# EAGLE board SparkFun_MicroMod_ESP32-Panel (EAGLE 9.6.2), part 1 of 6
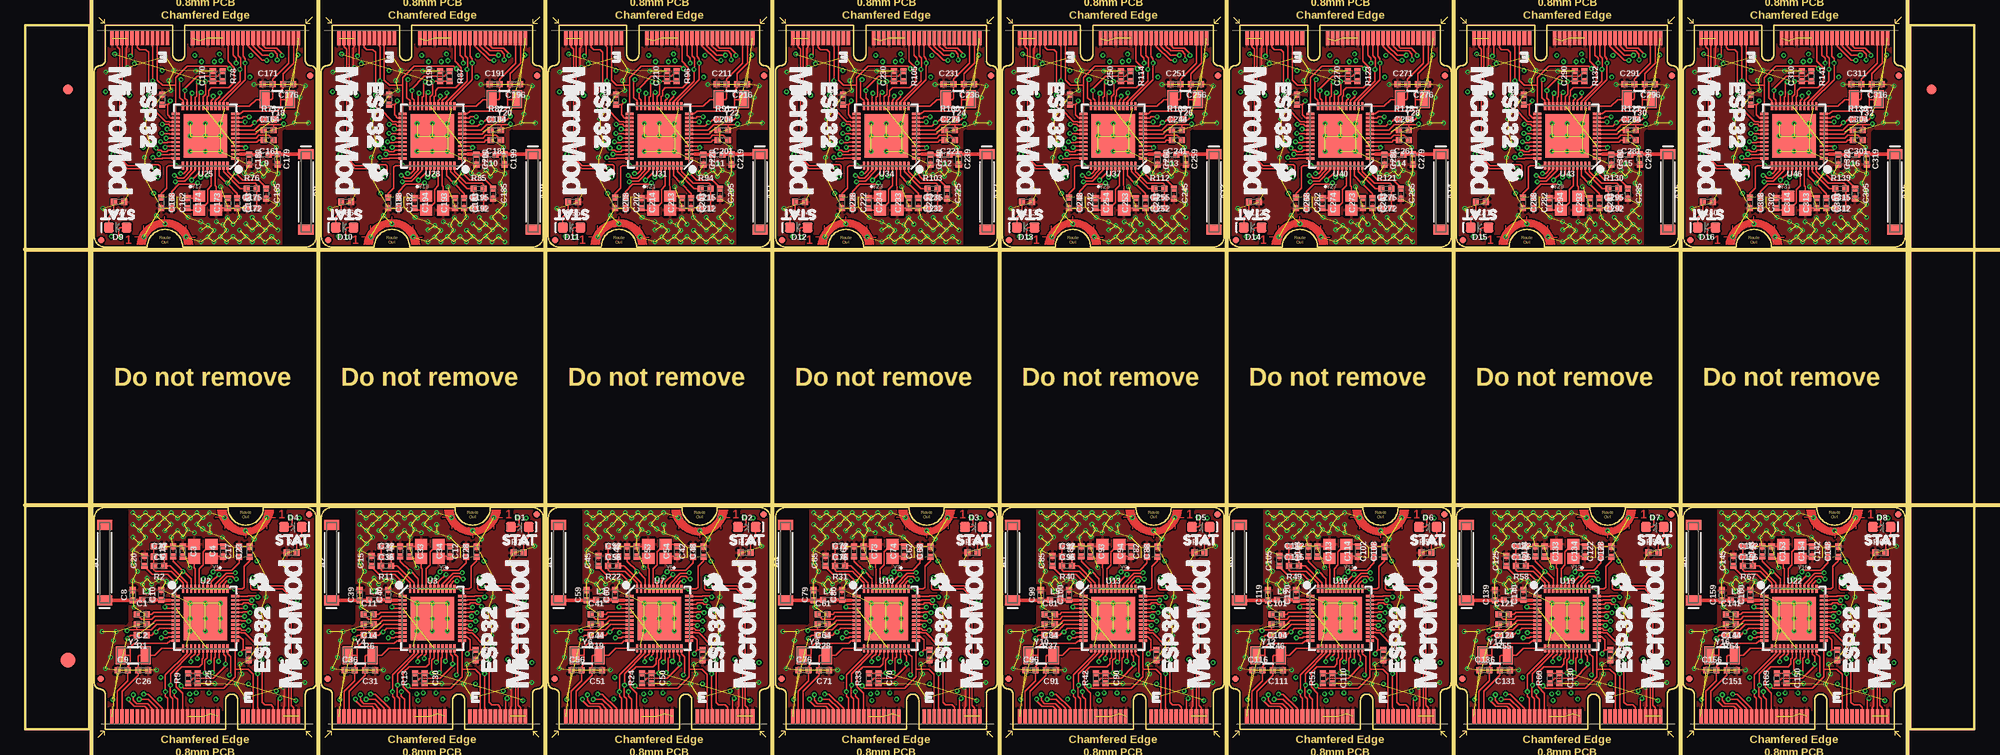
[diagram p0: board, top side]
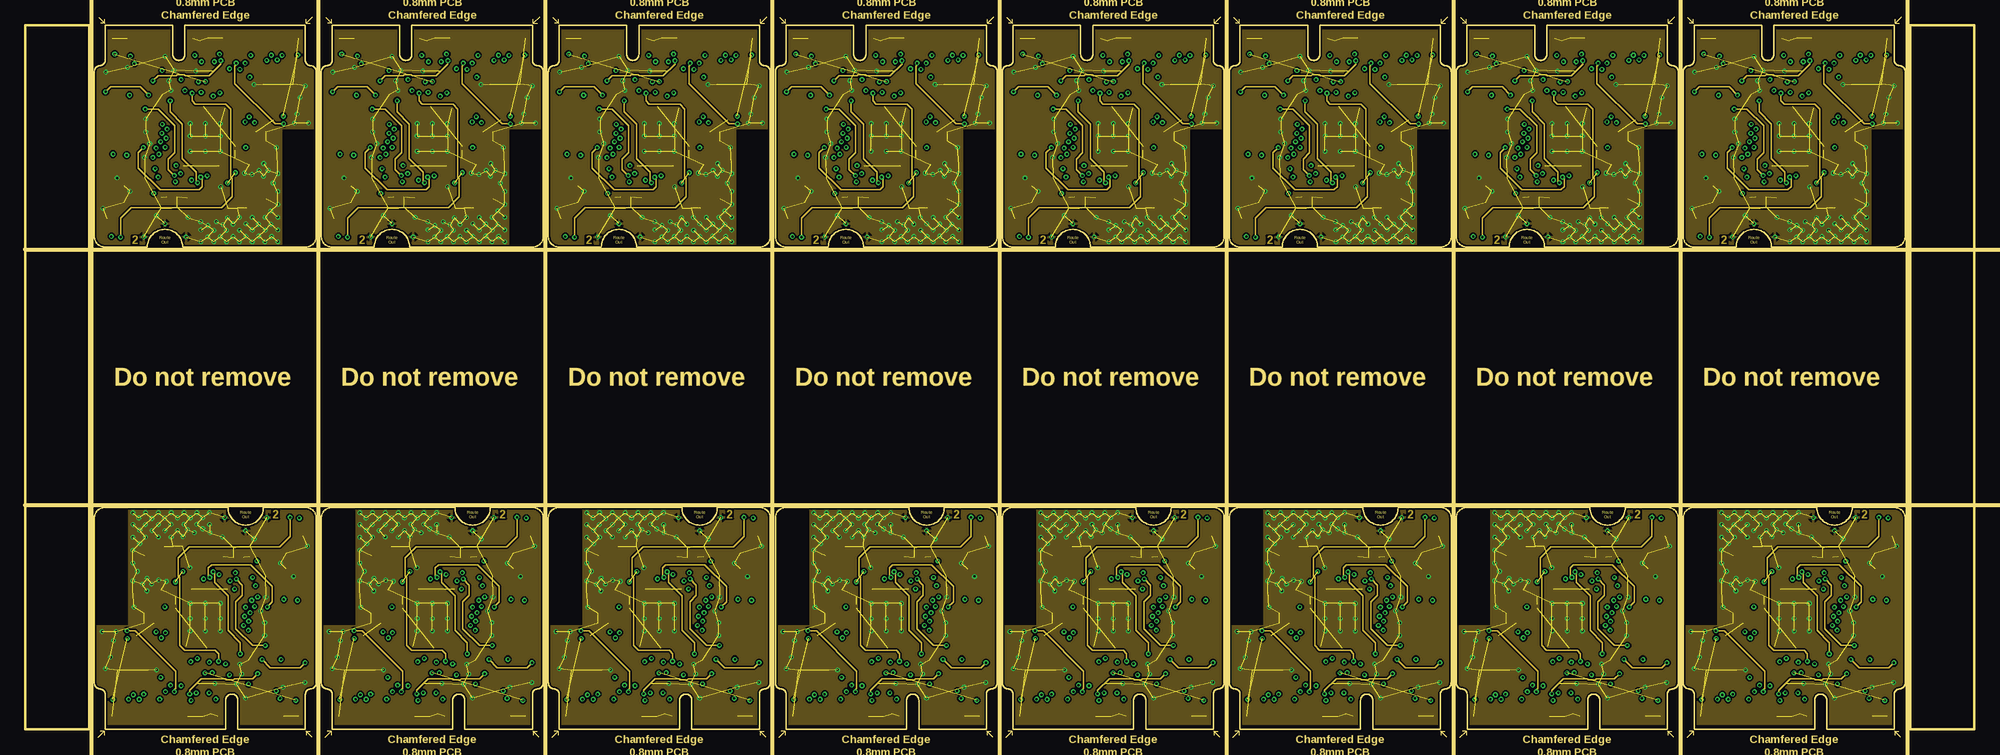
[diagram p1: board, inner layer Route2]
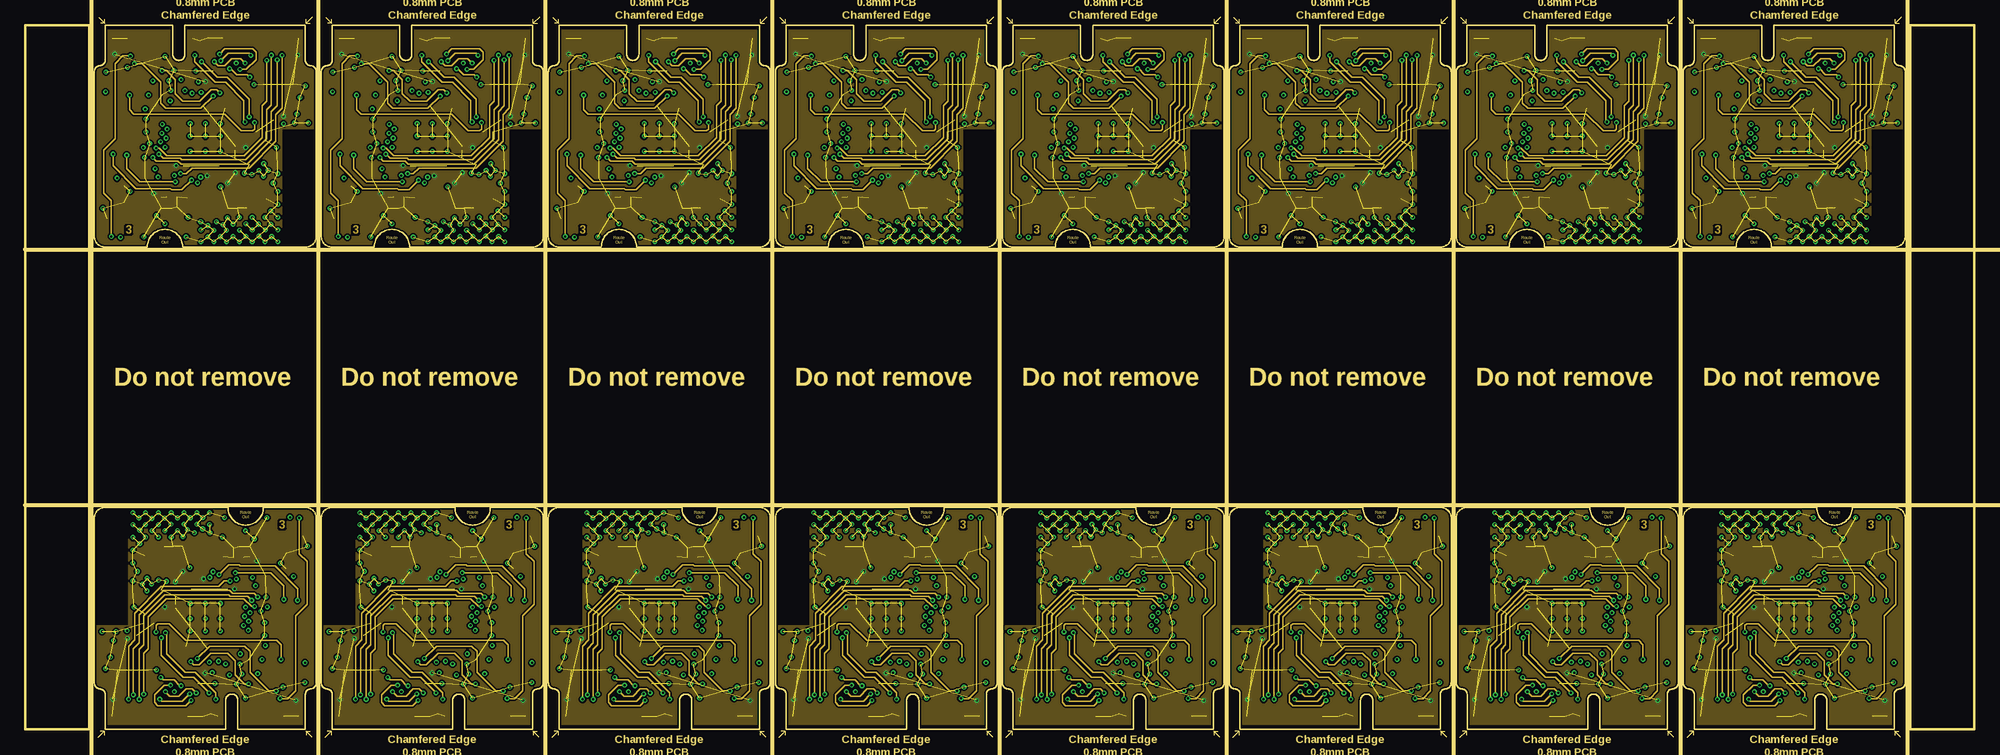
[diagram p2: board, inner layer Route15]
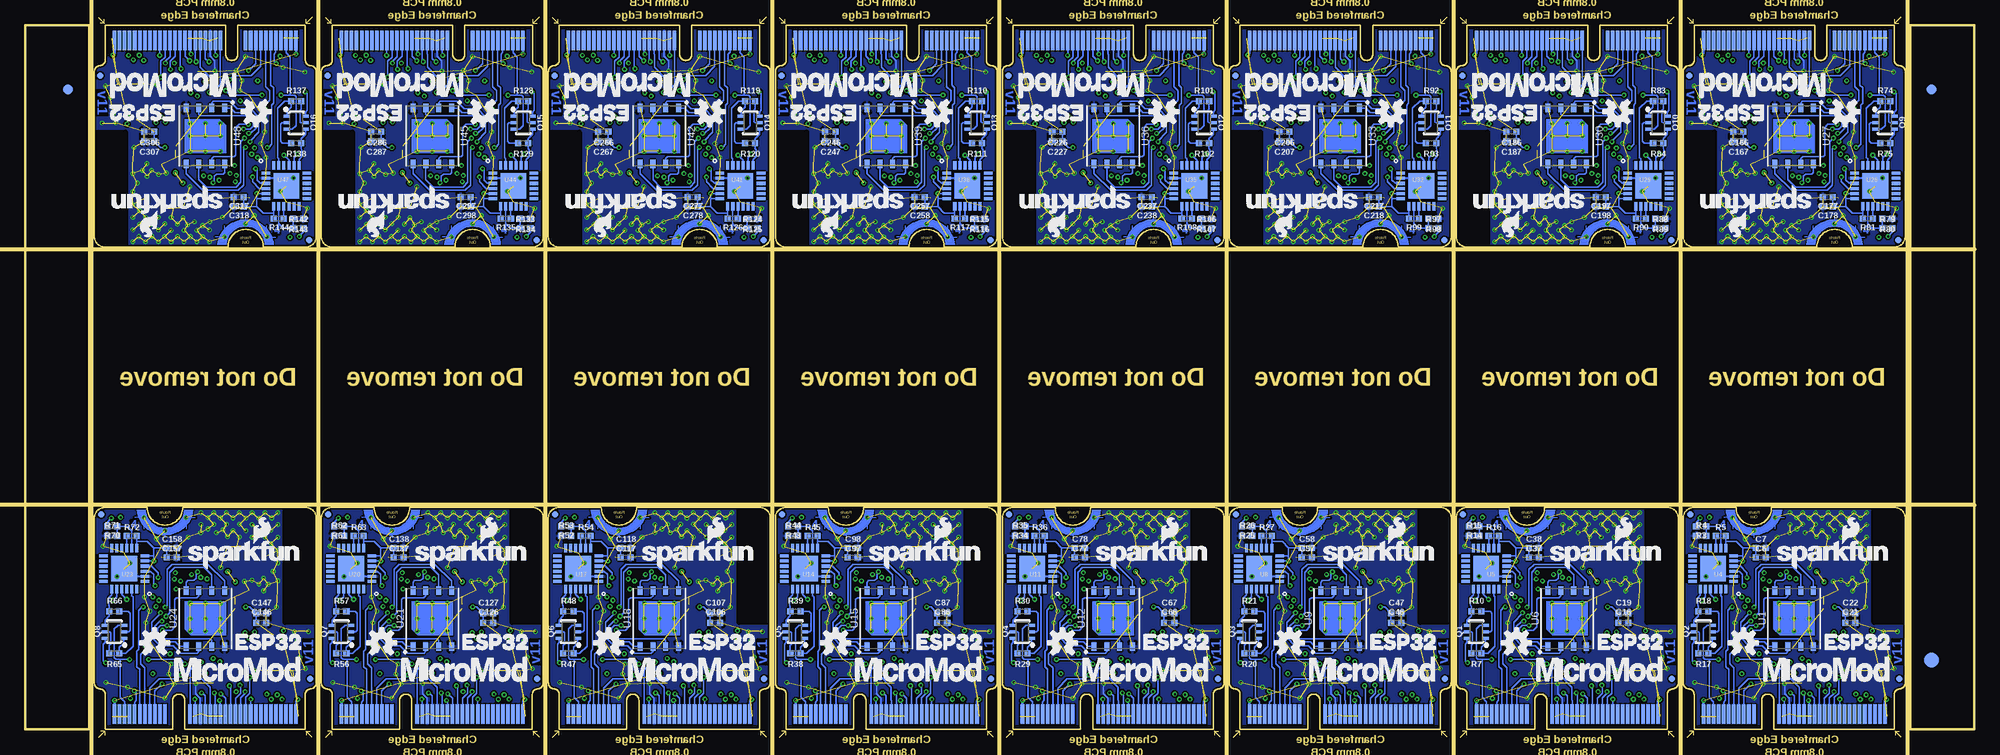
[diagram p3: board, bottom side, seen from below]

Size 193.27 x 69.85 mm. Coordinates in mm from the lower left corner, seen from the top.
Outline: 312 segments
Copper layers (1*2*15*16): Top 0.035559375mm / dielectric 0.47751875mm / Route2 0.035559375mm / dielectric 0.47751875mm / Route15 0.035559375mm / dielectric 0.47751875mm / Bottom 0.035559375mm
Design rules "SparkFun_MicroMod_ESP32": minimum track width 4mil, minimum drill 6mil, track to track 5mil, track to pad 5mil, pad to pad 5mil, via to via 5mil, smd to smd 5mil, copper to edge 4mil, drill to drill 4mil, minimum pad ring 5mil, minimum via ring 5mil, stop-mask expansion 4mil, vias tented up to drill 25mil, thermal gap 10mil
tRestrict: area 6.9,10.6 to 10,22; area 29.4,10.6 to 32.5,22; area 51.9,10.6 to 55,22; area 74.4,10.6 to 77.5,22; area 96.9,10.6 to 100,22; area 119.4,10.6 to 122.5,22; area 141.9,10.6 to 145,22; area 164.4,10.6 to 167.5,22; area 25.8,47.9 to 28.9,59.3; area 48.3,47.9 to 51.4,59.3; area 70.8,47.9 to 73.9,59.3; area 93.3,47.9 to 96.4,59.3; 4 more areas
bRestrict: area 6.9,10.6 to 10,22; area 29.4,10.6 to 32.5,22; area 51.9,10.6 to 55,22; area 74.4,10.6 to 77.5,22; area 96.9,10.6 to 100,22; area 119.4,10.6 to 122.5,22; area 141.9,10.6 to 145,22; area 164.4,10.6 to 167.5,22; area 25.8,47.9 to 28.9,59.3; area 48.3,47.9 to 51.4,59.3; area 70.8,47.9 to 73.9,59.3; area 93.3,47.9 to 96.4,59.3; 4 more areas; 64 lines
Milling: 11 lines

## Footprints (pad centres in the part's own frame; a part is rotated, then mirrored left to right if it is on the bottom)
ANT-2.4GHZ-8.0X1.0MM = smd 1 x 1.5: FEED -3.75,0; NC 3.75,0
0402-TIGHT = smd 0.6 x 0.6: 1 -0.5,0; 2 0.5,0
LED-0603 = smd 1 x 1: A -0.877,0; C 0.877,0
FIDUCIAL-1X2 = smd 1 x 1: 1 0,0
FIDUCIAL-1.5X3 = smd 1.5 x 1.5: 1 0,0
FIDUCIAL-MICRO = smd 0.635 x 0.635: 1 0,0
M.2-CARD-E-22 = smd 0.35 x 1.45: 1 9.25,1.275; 3 8.75,1.275; 5 8.25,1.275; 7 7.75,1.275; 9 7.25,1.275; 11 6.75,1.275; 13 6.25,1.275; 15 5.75,1.275; 17 5.25,1.275; 19 4.75,1.275; 21 4.25,1.275; 23 3.75,1.275; 33 1.25,1.275; 35 0.75,1.275; 37 0.25,1.275; 39 -0.25,1.275; 41 -0.75,1.275; 43 -1.25,1.275; 45 -1.75,1.275; 47 -2.25,1.275; 49 -2.75,1.275; 51 -3.25,1.275; 53 -3.75,1.275; 55 -4.25,1.275; 57 -4.75,1.275; 59 -5.25,1.275; 61 -5.75,1.275; 63 -6.25,1.275; 65 -6.75,1.275; 67 -7.25,1.275; 69 -7.75,1.275; 71 -8.25,1.275; 73 -8.75,1.275; 75 -9.25,1.275 | smd 0.35 x 1.95 bottom: 2 9,1.525; 4 8.5,1.525; 6 8,1.525; 8 7.5,1.525; 10 7,1.525; 12 6.5,1.525; 14 6,1.525; 16 5.5,1.525; 18 5,1.525; 20 4.5,1.525; 22 4,1.525; 32 1.5,1.525; 34 1,1.525; 36 0.5,1.525; 38 0,1.525; 40 -0.5,1.525; 42 -1,1.525; 44 -1.5,1.525; 46 -2,1.525; 48 -2.5,1.525; 50 -3,1.525; 52 -3.5,1.525; 54 -4,1.525; 56 -4.5,1.525; 58 -5,1.525; 60 -5.5,1.525; 62 -6,1.525; 64 -6.5,1.525; 66 -7,1.525; 68 -7.5,1.525; 70 -8,1.525; 72 -8.5,1.525; 74 -9,1.525 | drill 0.2: GND1 1.9,21; GND2 4,19.7; GND3 6.1,21
SC70-6 = smd 0.3 x 0.66: 1 -0.65,-0.92; 2 0,-0.92; 3 0.65,-0.92; 4 0.65,0.92; 5 0,0.92; 6 -0.65,0.92
WSON-8-6X5 = smd 0.85 x 0.5: 1 -2.775,1.905; 2 -2.775,0.635; 3 -2.775,-0.635; 4 -2.775,-1.905; 5 2.775,-1.905; 6 2.775,-0.635; 7 2.775,0.635; 8 2.775,1.905
QFN48-0.4MM = smd 0.8 x 0.23: 1 -2.95,2.2; 2 -2.95,1.8; 3 -2.95,1.4; 4 -2.95,1; 5 -2.95,0.6; 6 -2.95,0.2; 7 -2.95,-0.2; 8 -2.95,-0.6; 9 -2.95,-1; 10 -2.95,-1.4; 11 -2.95,-1.8; 12 -2.95,-2.2; 25 2.95,-2.2; 26 2.95,-1.8; 27 2.95,-1.4; 28 2.95,-1; 29 2.95,-0.6; 30 2.95,-0.2; 31 2.95,0.2; 32 2.95,0.6; 33 2.95,1; 34 2.95,1.4; 35 2.95,1.8; 36 2.95,2.2 | smd 0.23 x 0.8: 13 -2.2,-2.95; 14 -1.8,-2.95; 15 -1.4,-2.95; 16 -1,-2.95; 17 -0.6,-2.95; 18 -0.2,-2.95; 19 0.2,-2.95; 20 0.6,-2.95; 21 1,-2.95; 22 1.4,-2.95; 23 1.8,-2.95; 24 2.2,-2.95; 37 2.2,2.95; 38 1.8,2.95; 39 1.4,2.95; 40 1,2.95; 41 0.6,2.95; 42 0.2,2.95; 43 -0.2,2.95; 44 -0.6,2.95; 45 -1,2.95; 46 -1.4,2.95; 47 -1.8,2.95; 48 -2.2,2.95 | smd 4.3 x 4.3: EP 0,0
QFN24 = smd 0.85 x 0.3: 1 -2.05,1.25; 2 -2.05,0.75; 3 -2.05,0.25; 4 -2.05,-0.25; 5 -2.05,-0.75; 6 -2.05,-1.25; 13 2.05,-1.25; 14 2.05,-0.75; 15 2.05,-0.25; 16 2.05,0.25; 17 2.05,0.75; 18 2.05,1.25 | smd 0.3 x 0.85: 7 -1.25,-2.05; 8 -0.75,-2.05; 9 -0.25,-2.05; 10 0.25,-2.05; 11 0.75,-2.05; 12 1.25,-2.05; 19 1.25,2.05; 20 0.75,2.05; 21 0.25,2.05; 22 -0.25,2.05; 23 -0.75,2.05; 24 -1.25,2.05 | smd 2.55 x 2.55: PAD 0,0
CRYSTAL-SMD-2X2.5MM = smd 1.2 x 1.1: P1 0.846,0.69; P2 -0.854,0.69; P3 -0.854,-0.71; P4 0.846,-0.71
CRYSTAL-SMD-3.2X1.5MM = smd 1 x 1.8: P$1 -1.25,0; P$2 1.25,0

## Placement (x,y rotation side)
A1  [ANT-2.4GHZ-8.0X1.0MM]  7.87,16.54 90 top
A2  [ANT-2.4GHZ-8.0X1.0MM]  30.38,16.54 90 top
A3  [ANT-2.4GHZ-8.0X1.0MM]  52.89,16.54 90 top
A4  [ANT-2.4GHZ-8.0X1.0MM]  75.4,16.54 90 top
A5  [ANT-2.4GHZ-8.0X1.0MM]  97.91,16.54 90 top
A6  [ANT-2.4GHZ-8.0X1.0MM]  120.41,16.54 90 top
A7  [ANT-2.4GHZ-8.0X1.0MM]  142.92,16.54 90 top
A8  [ANT-2.4GHZ-8.0X1.0MM]  165.43,16.54 90 top
A9  [ANT-2.4GHZ-8.0X1.0MM]  27.84,53.31 270 top
A10  [ANT-2.4GHZ-8.0X1.0MM]  50.35,53.31 270 top
A11  [ANT-2.4GHZ-8.0X1.0MM]  72.86,53.31 270 top
A12  [ANT-2.4GHZ-8.0X1.0MM]  95.37,53.31 270 top
A13  [ANT-2.4GHZ-8.0X1.0MM]  117.87,53.31 270 top
A14  [ANT-2.4GHZ-8.0X1.0MM]  140.38,53.31 270 top
A15  [ANT-2.4GHZ-8.0X1.0MM]  162.89,53.31 270 top
A16  [ANT-2.4GHZ-8.0X1.0MM]  185.4,53.31 270 top
C1  270pF  [0402-TIGHT]  11.56,11.42 0 top
C2  270pF  [0402-TIGHT]  11.56,10.4 180 top
C3  12pF  [0402-TIGHT]  15.61,17.63 270 top
C4  12pF  [0402-TIGHT]  19.63,17.63 90 top
C5  10nF  [0402-TIGHT]  13.27,18.14 180 top
C6  0.1uF  [0402-TIGHT]  21.18,17.06 0 bottom
C7  4.7uF  [0402-TIGHT]  21.18,18.01 0 bottom
C8  DNP  [0402-TIGHT]  10.67,13.31 90 top
C9  15pF  [0402-TIGHT]  9.65,5.84 0 top
C10  DNP  [0402-TIGHT]  13.49,13.34 90 top
C11  270pF  [0402-TIGHT]  34.06,11.42 0 top
C12  0.1uF  [0402-TIGHT]  43.71,17.62 90 top
C13  100pF  [0402-TIGHT]  37.19,17.64 90 top
C14  270pF  [0402-TIGHT]  34.06,10.4 180 top
C15  0.1uF  [0402-TIGHT]  34.33,16.7 90 top
C16  0.1uF  [0402-TIGHT]  34.81,10.58 0 bottom
C17  0.1uF  [0402-TIGHT]  21.2,17.62 90 top
C18  100pF  [0402-TIGHT]  14.68,17.64 90 top
C19  10uF  [0402-TIGHT]  34.81,11.5 0 bottom
C20  0.1uF  [0402-TIGHT]  11.83,16.7 90 top
C21  0.1uF  [0402-TIGHT]  12.31,10.58 0 bottom
C22  10uF  [0402-TIGHT]  12.31,11.5 0 bottom
C23  0.1uF  [0402-TIGHT]  22.25,17.62 90 top
C24  1.0uF  [0402-TIGHT]  22.14,7.37 270 top
C25  0.1uF  [0402-TIGHT]  17.1,5.06 270 top
C26  15pF  [0402-TIGHT]  11.68,5.84 180 top
C27  3.0nF  [0402-TIGHT]  13.27,17.13 0 top
C28  0.1uF  [0402-TIGHT]  44.76,17.62 90 top
C29  1.0uF  [0402-TIGHT]  44.65,7.37 270 top
C30  0.1uF  [0402-TIGHT]  39.6,5.06 270 top
C31  15pF  [0402-TIGHT]  34.19,5.84 180 top
C32  3.0nF  [0402-TIGHT]  35.77,17.13 0 top
C33  12pF  [0402-TIGHT]  38.12,17.63 270 top
C34  12pF  [0402-TIGHT]  42.14,17.63 90 top
C35  10nF  [0402-TIGHT]  35.77,18.14 180 top
C36  15pF  [0402-TIGHT]  32.16,5.84 0 top
C37  0.1uF  [0402-TIGHT]  43.69,17.06 0 bottom
C38  4.7uF  [0402-TIGHT]  43.69,18.01 0 bottom
C39  DNP  [0402-TIGHT]  33.17,13.31 90 top
C40  DNP  [0402-TIGHT]  35.99,13.34 90 top
C41  270pF  [0402-TIGHT]  56.57,11.42 0 top
C42  0.1uF  [0402-TIGHT]  66.22,17.62 90 top
C43  100pF  [0402-TIGHT]  59.7,17.64 90 top
C44  270pF  [0402-TIGHT]  56.57,10.4 180 top
C45  0.1uF  [0402-TIGHT]  56.84,16.7 90 top
C46  0.1uF  [0402-TIGHT]  57.32,10.58 0 bottom
C47  10uF  [0402-TIGHT]  57.32,11.5 0 bottom
C48  0.1uF  [0402-TIGHT]  67.27,17.62 90 top
C49  1.0uF  [0402-TIGHT]  67.16,7.37 270 top
C50  0.1uF  [0402-TIGHT]  62.11,5.06 270 top
C51  15pF  [0402-TIGHT]  56.7,5.84 180 top
C52  3.0nF  [0402-TIGHT]  58.28,17.13 0 top
C53  12pF  [0402-TIGHT]  60.63,17.63 270 top
C54  12pF  [0402-TIGHT]  64.65,17.63 90 top
C55  10nF  [0402-TIGHT]  58.28,18.14 180 top
C56  15pF  [0402-TIGHT]  54.67,5.84 0 top
C57  0.1uF  [0402-TIGHT]  66.2,17.06 0 bottom
C58  4.7uF  [0402-TIGHT]  66.2,18.01 0 bottom
C59  DNP  [0402-TIGHT]  55.68,13.31 90 top
C60  DNP  [0402-TIGHT]  58.5,13.34 90 top
C61  270pF  [0402-TIGHT]  79.08,11.42 0 top
C62  0.1uF  [0402-TIGHT]  88.73,17.62 90 top
C63  100pF  [0402-TIGHT]  82.21,17.64 90 top
C64  270pF  [0402-TIGHT]  79.08,10.4 180 top
C65  0.1uF  [0402-TIGHT]  79.35,16.7 90 top
C66  0.1uF  [0402-TIGHT]  79.83,10.58 0 bottom
C67  10uF  [0402-TIGHT]  79.83,11.5 0 bottom
C68  0.1uF  [0402-TIGHT]  89.77,17.62 90 top
C69  1.0uF  [0402-TIGHT]  89.66,7.37 270 top
C70  0.1uF  [0402-TIGHT]  84.62,5.06 270 top
C71  15pF  [0402-TIGHT]  79.21,5.84 180 top
C72  3.0nF  [0402-TIGHT]  80.79,17.13 0 top
C73  12pF  [0402-TIGHT]  83.14,17.63 270 top
C74  12pF  [0402-TIGHT]  87.15,17.63 90 top
C75  10nF  [0402-TIGHT]  80.79,18.14 180 top
C76  15pF  [0402-TIGHT]  77.18,5.84 0 top
C77  0.1uF  [0402-TIGHT]  88.7,17.06 0 bottom
C78  4.7uF  [0402-TIGHT]  88.7,18.01 0 bottom
C79  DNP  [0402-TIGHT]  78.19,13.31 90 top
C80  DNP  [0402-TIGHT]  81.01,13.34 90 top
C81  270pF  [0402-TIGHT]  101.59,11.42 0 top
C82  0.1uF  [0402-TIGHT]  111.24,17.62 90 top
C83  100pF  [0402-TIGHT]  104.72,17.64 90 top
C84  270pF  [0402-TIGHT]  101.59,10.4 180 top
C85  0.1uF  [0402-TIGHT]  101.86,16.7 90 top
C86  0.1uF  [0402-TIGHT]  102.34,10.58 0 bottom
C87  10uF  [0402-TIGHT]  102.34,11.5 0 bottom
C88  0.1uF  [0402-TIGHT]  112.28,17.62 90 top
C89  1.0uF  [0402-TIGHT]  112.17,7.37 270 top
C90  0.1uF  [0402-TIGHT]  107.13,5.06 270 top
C91  15pF  [0402-TIGHT]  101.72,5.84 180 top
C92  3.0nF  [0402-TIGHT]  103.3,17.13 0 top
C93  12pF  [0402-TIGHT]  105.65,17.63 270 top
C94  12pF  [0402-TIGHT]  109.66,17.63 90 top
C95  10nF  [0402-TIGHT]  103.3,18.14 180 top
C96  15pF  [0402-TIGHT]  99.68,5.84 0 top
C97  0.1uF  [0402-TIGHT]  111.21,17.06 0 bottom
C98  4.7uF  [0402-TIGHT]  111.21,18.01 0 bottom
C99  DNP  [0402-TIGHT]  100.7,13.31 90 top
C100  DNP  [0402-TIGHT]  103.52,13.34 90 top
C101  270pF  [0402-TIGHT]  124.1,11.42 0 top
C102  0.1uF  [0402-TIGHT]  133.74,17.62 90 top
C103  100pF  [0402-TIGHT]  127.22,17.64 90 top
C104  270pF  [0402-TIGHT]  124.1,10.4 180 top
C105  0.1uF  [0402-TIGHT]  124.37,16.7 90 top
C106  0.1uF  [0402-TIGHT]  124.85,10.58 0 bottom
C107  10uF  [0402-TIGHT]  124.85,11.5 0 bottom
C108  0.1uF  [0402-TIGHT]  134.79,17.62 90 top
C109  1.0uF  [0402-TIGHT]  134.68,7.37 270 top
C110  0.1uF  [0402-TIGHT]  129.64,5.06 270 top
C111  15pF  [0402-TIGHT]  124.22,5.84 180 top
C112  3.0nF  [0402-TIGHT]  125.8,17.13 0 top
C113  12pF  [0402-TIGHT]  128.15,17.63 270 top
C114  12pF  [0402-TIGHT]  132.17,17.63 90 top
C115  10nF  [0402-TIGHT]  125.8,18.14 180 top
C116  15pF  [0402-TIGHT]  122.19,5.84 0 top
C117  0.1uF  [0402-TIGHT]  133.72,17.06 0 bottom
C118  4.7uF  [0402-TIGHT]  133.72,18.01 0 bottom
C119  DNP  [0402-TIGHT]  123.21,13.31 90 top
C120  DNP  [0402-TIGHT]  126.03,13.34 90 top
C121  270pF  [0402-TIGHT]  146.61,11.42 0 top
C122  0.1uF  [0402-TIGHT]  156.25,17.62 90 top
C123  100pF  [0402-TIGHT]  149.73,17.64 90 top
C124  270pF  [0402-TIGHT]  146.61,10.4 180 top
C125  0.1uF  [0402-TIGHT]  146.88,16.7 90 top
C126  0.1uF  [0402-TIGHT]  147.36,10.58 0 bottom
C127  10uF  [0402-TIGHT]  147.36,11.5 0 bottom
C128  0.1uF  [0402-TIGHT]  157.3,17.62 90 top
C129  1.0uF  [0402-TIGHT]  157.19,7.37 270 top
C130  0.1uF  [0402-TIGHT]  152.15,5.06 270 top
C131  15pF  [0402-TIGHT]  146.73,5.84 180 top
C132  3.0nF  [0402-TIGHT]  148.31,17.13 0 top
C133  12pF  [0402-TIGHT]  150.66,17.63 270 top
C134  12pF  [0402-TIGHT]  154.68,17.63 90 top
C135  10nF  [0402-TIGHT]  148.31,18.14 180 top
C136  15pF  [0402-TIGHT]  144.7,5.84 0 top
C137  0.1uF  [0402-TIGHT]  156.23,17.06 0 bottom
C138  4.7uF  [0402-TIGHT]  156.23,18.01 0 bottom
C139  DNP  [0402-TIGHT]  145.72,13.31 90 top
C140  DNP  [0402-TIGHT]  148.54,13.34 90 top
C141  270pF  [0402-TIGHT]  169.11,11.42 0 top
C142  0.1uF  [0402-TIGHT]  178.76,17.62 90 top
C143  100pF  [0402-TIGHT]  172.24,17.64 90 top
C144  270pF  [0402-TIGHT]  169.11,10.4 180 top
C145  0.1uF  [0402-TIGHT]  169.38,16.7 90 top
C146  0.1uF  [0402-TIGHT]  169.86,10.58 0 bottom
C147  10uF  [0402-TIGHT]  169.86,11.5 0 bottom
C148  0.1uF  [0402-TIGHT]  179.81,17.62 90 top
C149  1.0uF  [0402-TIGHT]  179.7,7.37 270 top
C150  0.1uF  [0402-TIGHT]  174.65,5.06 270 top
C151  15pF  [0402-TIGHT]  169.24,5.84 180 top
C152  3.0nF  [0402-TIGHT]  170.82,17.13 0 top
C153  12pF  [0402-TIGHT]  173.17,17.63 270 top
C154  12pF  [0402-TIGHT]  177.19,17.63 90 top
C155  10nF  [0402-TIGHT]  170.82,18.14 180 top
C156  15pF  [0402-TIGHT]  167.21,5.84 0 top
C157  0.1uF  [0402-TIGHT]  178.74,17.06 0 bottom
C158  4.7uF  [0402-TIGHT]  178.74,18.01 0 bottom
C159  DNP  [0402-TIGHT]  168.22,13.31 90 top
C160  DNP  [0402-TIGHT]  171.04,13.34 90 top
C161  270pF  [0402-TIGHT]  24.16,58.43 180 top
C162  0.1uF  [0402-TIGHT]  14.51,52.23 270 top
C163  100pF  [0402-TIGHT]  21.03,52.22 270 top
C164  270pF  [0402-TIGHT]  24.16,59.45 0 top
C165  0.1uF  [0402-TIGHT]  23.89,53.15 270 top
C166  0.1uF  [0402-TIGHT]  23.41,59.27 180 bottom
C167  10uF  [0402-TIGHT]  23.41,58.35 180 bottom
C168  0.1uF  [0402-TIGHT]  13.46,52.23 270 top
C169  1.0uF  [0402-TIGHT]  13.58,62.48 90 top
C170  0.1uF  [0402-TIGHT]  18.62,64.79 90 top
C171  15pF  [0402-TIGHT]  24.03,64.01 0 top
C172  3.0nF  [0402-TIGHT]  22.45,52.72 180 top
C173  12pF  [0402-TIGHT]  20.1,52.22 90 top
C174  12pF  [0402-TIGHT]  16.09,52.22 270 top
C175  10nF  [0402-TIGHT]  22.45,51.71 0 top
C176  15pF  [0402-TIGHT]  26.06,64.01 180 top
C177  0.1uF  [0402-TIGHT]  14.54,52.79 180 bottom
C178  4.7uF  [0402-TIGHT]  14.54,51.84 180 bottom
C179  DNP  [0402-TIGHT]  25.05,56.54 270 top
C180  DNP  [0402-TIGHT]  22.23,56.52 270 top
C181  270pF  [0402-TIGHT]  46.67,58.43 180 top
C182  0.1uF  [0402-TIGHT]  37.02,52.23 270 top
C183  100pF  [0402-TIGHT]  43.54,52.22 270 top
C184  270pF  [0402-TIGHT]  46.67,59.45 0 top
C185  0.1uF  [0402-TIGHT]  46.4,53.15 270 top
C186  0.1uF  [0402-TIGHT]  45.92,59.27 180 bottom
C187  10uF  [0402-TIGHT]  45.92,58.35 180 bottom
C188  0.1uF  [0402-TIGHT]  35.97,52.23 270 top
C189  1.0uF  [0402-TIGHT]  36.09,62.48 90 top
C190  0.1uF  [0402-TIGHT]  41.13,64.79 90 top
C191  15pF  [0402-TIGHT]  46.54,64.01 0 top
C192  3.0nF  [0402-TIGHT]  44.96,52.72 180 top
C193  12pF  [0402-TIGHT]  42.61,52.22 90 top
C194  12pF  [0402-TIGHT]  38.6,52.22 270 top
C195  10nF  [0402-TIGHT]  44.96,51.71 0 top
C196  15pF  [0402-TIGHT]  48.57,64.01 180 top
C197  0.1uF  [0402-TIGHT]  37.04,52.79 180 bottom
C198  4.7uF  [0402-TIGHT]  37.04,51.84 180 bottom
C199  DNP  [0402-TIGHT]  47.56,56.54 270 top
C200  DNP  [0402-TIGHT]  44.74,56.52 270 top
C201  270pF  [0402-TIGHT]  69.17,58.43 180 top
C202  0.1uF  [0402-TIGHT]  59.53,52.23 270 top
C203  100pF  [0402-TIGHT]  66.05,52.22 270 top
C204  270pF  [0402-TIGHT]  69.17,59.45 0 top
C205  0.1uF  [0402-TIGHT]  68.91,53.15 270 top
C206  0.1uF  [0402-TIGHT]  68.42,59.27 180 bottom
C207  10uF  [0402-TIGHT]  68.42,58.35 180 bottom
C208  0.1uF  [0402-TIGHT]  58.48,52.23 270 top
C209  1.0uF  [0402-TIGHT]  58.59,62.48 90 top
C210  0.1uF  [0402-TIGHT]  63.63,64.79 90 top
C211  15pF  [0402-TIGHT]  69.05,64.01 0 top
C212  3.0nF  [0402-TIGHT]  67.47,52.72 180 top
C213  12pF  [0402-TIGHT]  65.12,52.22 90 top
C214  12pF  [0402-TIGHT]  61.1,52.22 270 top
C215  10nF  [0402-TIGHT]  67.47,51.71 0 top
C216  15pF  [0402-TIGHT]  71.08,64.01 180 top
C217  0.1uF  [0402-TIGHT]  59.55,52.79 180 bottom
C218  4.7uF  [0402-TIGHT]  59.55,51.84 180 bottom
C219  DNP  [0402-TIGHT]  70.06,56.54 270 top
C220  DNP  [0402-TIGHT]  67.24,56.52 270 top
C221  270pF  [0402-TIGHT]  91.68,58.43 180 top
C222  0.1uF  [0402-TIGHT]  82.04,52.23 270 top
C223  100pF  [0402-TIGHT]  88.56,52.22 270 top
C224  270pF  [0402-TIGHT]  91.68,59.45 0 top
C225  0.1uF  [0402-TIGHT]  91.41,53.15 270 top
C226  0.1uF  [0402-TIGHT]  90.93,59.27 180 bottom
C227  10uF  [0402-TIGHT]  90.93,58.35 180 bottom
C228  0.1uF  [0402-TIGHT]  80.99,52.23 270 top
C229  1.0uF  [0402-TIGHT]  81.1,62.48 90 top
C230  0.1uF  [0402-TIGHT]  86.14,64.79 90 top
C231  15pF  [0402-TIGHT]  91.56,64.01 0 top
C232  3.0nF  [0402-TIGHT]  89.98,52.72 180 top
C233  12pF  [0402-TIGHT]  87.63,52.22 90 top
C234  12pF  [0402-TIGHT]  83.61,52.22 270 top
C235  10nF  [0402-TIGHT]  89.98,51.71 0 top
C236  15pF  [0402-TIGHT]  93.59,64.01 180 top
C237  0.1uF  [0402-TIGHT]  82.06,52.79 180 bottom
C238  4.7uF  [0402-TIGHT]  82.06,51.84 180 bottom
C239  DNP  [0402-TIGHT]  92.57,56.54 270 top
C240  DNP  [0402-TIGHT]  89.75,56.52 270 top
C241  270pF  [0402-TIGHT]  114.19,58.43 180 top
C242  0.1uF  [0402-TIGHT]  104.54,52.23 270 top
C243  100pF  [0402-TIGHT]  111.06,52.22 270 top
C244  270pF  [0402-TIGHT]  114.19,59.45 0 top
C245  0.1uF  [0402-TIGHT]  113.92,53.15 270 top
C246  0.1uF  [0402-TIGHT]  113.44,59.27 180 bottom
C247  10uF  [0402-TIGHT]  113.44,58.35 180 bottom
C248  0.1uF  [0402-TIGHT]  103.5,52.23 270 top
C249  1.0uF  [0402-TIGHT]  103.61,62.48 90 top
C250  0.1uF  [0402-TIGHT]  108.65,64.79 90 top
C251  15pF  [0402-TIGHT]  114.06,64.01 0 top
C252  3.0nF  [0402-TIGHT]  112.48,52.72 180 top
C253  12pF  [0402-TIGHT]  110.13,52.22 90 top
C254  12pF  [0402-TIGHT]  106.12,52.22 270 top
C255  10nF  [0402-TIGHT]  112.48,51.71 0 top
C256  15pF  [0402-TIGHT]  116.1,64.01 180 top
C257  0.1uF  [0402-TIGHT]  104.57,52.79 180 bottom
C258  4.7uF  [0402-TIGHT]  104.57,51.84 180 bottom
C259  DNP  [0402-TIGHT]  115.08,56.54 270 top
C260  DNP  [0402-TIGHT]  112.26,56.52 270 top
C261  270pF  [0402-TIGHT]  136.7,58.43 180 top
C262  0.1uF  [0402-TIGHT]  127.05,52.23 270 top
C263  100pF  [0402-TIGHT]  133.57,52.22 270 top
C264  270pF  [0402-TIGHT]  136.7,59.45 0 top
C265  0.1uF  [0402-TIGHT]  136.43,53.15 270 top
C266  0.1uF  [0402-TIGHT]  135.95,59.27 180 bottom
C267  10uF  [0402-TIGHT]  135.95,58.35 180 bottom
C268  0.1uF  [0402-TIGHT]  126.01,52.23 270 top
C269  1.0uF  [0402-TIGHT]  126.12,62.48 90 top
C270  0.1uF  [0402-TIGHT]  131.16,64.79 90 top
C271  15pF  [0402-TIGHT]  136.57,64.01 0 top
C272  3.0nF  [0402-TIGHT]  134.99,52.72 180 top
C273  12pF  [0402-TIGHT]  132.64,52.22 90 top
C274  12pF  [0402-TIGHT]  128.63,52.22 270 top
C275  10nF  [0402-TIGHT]  134.99,51.71 0 top
C276  15pF  [0402-TIGHT]  138.61,64.01 180 top
C277  0.1uF  [0402-TIGHT]  127.08,52.79 180 bottom
C278  4.7uF  [0402-TIGHT]  127.08,51.84 180 bottom
C279  DNP  [0402-TIGHT]  137.59,56.54 270 top
C280  DNP  [0402-TIGHT]  134.77,56.52 270 top
C281  270pF  [0402-TIGHT]  159.21,58.43 180 top
C282  0.1uF  [0402-TIGHT]  149.56,52.23 270 top
C283  100pF  [0402-TIGHT]  156.08,52.22 270 top
C284  270pF  [0402-TIGHT]  159.21,59.45 0 top
C285  0.1uF  [0402-TIGHT]  158.94,53.15 270 top
C286  0.1uF  [0402-TIGHT]  158.46,59.27 180 bottom
C287  10uF  [0402-TIGHT]  158.46,58.35 180 bottom
C288  0.1uF  [0402-TIGHT]  148.51,52.23 270 top
C289  1.0uF  [0402-TIGHT]  148.63,62.48 90 top
C290  0.1uF  [0402-TIGHT]  153.67,64.79 90 top
C291  15pF  [0402-TIGHT]  159.08,64.01 0 top
C292  3.0nF  [0402-TIGHT]  157.5,52.72 180 top
C293  12pF  [0402-TIGHT]  155.15,52.22 90 top
C294  12pF  [0402-TIGHT]  151.14,52.22 270 top
C295  10nF  [0402-TIGHT]  157.5,51.71 0 top
C296  15pF  [0402-TIGHT]  161.11,64.01 180 top
C297  0.1uF  [0402-TIGHT]  149.58,52.79 180 bottom
C298  4.7uF  [0402-TIGHT]  149.58,51.84 180 bottom
C299  DNP  [0402-TIGHT]  160.1,56.54 270 top
C300  DNP  [0402-TIGHT]  157.28,56.52 270 top
C301  270pF  [0402-TIGHT]  181.71,58.43 180 top
C302  0.1uF  [0402-TIGHT]  172.07,52.23 270 top
C303  100pF  [0402-TIGHT]  178.59,52.22 270 top
C304  270pF  [0402-TIGHT]  181.71,59.45 0 top
C305  0.1uF  [0402-TIGHT]  181.45,53.15 270 top
C306  0.1uF  [0402-TIGHT]  180.96,59.27 180 bottom
C307  10uF  [0402-TIGHT]  180.96,58.35 180 bottom
C308  0.1uF  [0402-TIGHT]  171.02,52.23 270 top
C309  1.0uF  [0402-TIGHT]  171.13,62.48 90 top
C310  0.1uF  [0402-TIGHT]  176.17,64.79 90 top
C311  15pF  [0402-TIGHT]  181.59,64.01 0 top
C312  3.0nF  [0402-TIGHT]  180.01,52.72 180 top
C313  12pF  [0402-TIGHT]  177.66,52.22 90 top
C314  12pF  [0402-TIGHT]  173.64,52.22 270 top
C315  10nF  [0402-TIGHT]  180.01,51.71 0 top
C316  15pF  [0402-TIGHT]  183.62,64.01 180 top
C317  0.1uF  [0402-TIGHT]  172.09,52.79 180 bottom
C318  4.7uF  [0402-TIGHT]  172.09,51.84 180 bottom
C319  DNP  [0402-TIGHT]  182.6,56.54 270 top
C320  DNP  [0402-TIGHT]  179.78,56.52 270 top
D1  BLUE  [LED-0603]  49.05,20.07 0 top
D2  BLUE  [LED-0603]  71.56,20.07 0 top
D3  BLUE  [LED-0603]  94.07,20.07 0 top
D4  BLUE  [LED-0603]  26.54,20.07 0 top
D5  BLUE  [LED-0603]  116.58,20.07 0 top
D6  BLUE  [LED-0603]  139.08,20.07 0 top
D7  BLUE  [LED-0603]  161.59,20.07 0 top
D8  BLUE  [LED-0603]  184.1,20.07 0 top
D9  BLUE  [LED-0603]  9.17,49.78 180 top
D10  BLUE  [LED-0603]  31.68,49.78 180 top
D11  BLUE  [LED-0603]  54.19,49.78 180 top
D12  BLUE  [LED-0603]  76.7,49.78 180 top
D13  BLUE  [LED-0603]  99.2,49.78 180 top
D14  BLUE  [LED-0603]  121.71,49.78 180 top
D15  BLUE  [LED-0603]  144.22,49.78 180 top
D16  BLUE  [LED-0603]  166.73,49.78 180 top
E$1  [FIDUCIAL-1X2]  4.23,63.5 0 top
E$2  [FIDUCIAL-1X2]  4.23,63.5 0 bottom
E$3  [FIDUCIAL-1X2]  189.04,63.5 0 top
E$4  [FIDUCIAL-1X2]  189.04,63.5 0 bottom
E$5  [FIDUCIAL-1.5X3]  4.23,6.86 0 top
E$6  [FIDUCIAL-1.5X3]  4.23,6.86 0 bottom
FD1  FIDUCIALUFIDUCIAL  [FIDUCIAL-MICRO]  7.47,5 0 top
FD2  FIDUCIALUFIDUCIAL  [FIDUCIAL-MICRO]  7.46,5 0 bottom
FD3  FIDUCIALUFIDUCIAL  [FIDUCIAL-MICRO]  28.18,21.3 0 bottom
FD4  FIDUCIALUFIDUCIAL  [FIDUCIAL-MICRO]  28.18,21.3 0 top
FD5  FIDUCIALUFIDUCIAL  [FIDUCIAL-MICRO]  29.98,5 0 top
FD6  FIDUCIALUFIDUCIAL  [FIDUCIAL-MICRO]  29.97,5 0 bottom
FD7  FIDUCIALUFIDUCIAL  [FIDUCIAL-MICRO]  50.69,21.3 0 bottom
FD8  FIDUCIALUFIDUCIAL  [FIDUCIAL-MICRO]  50.69,21.3 0 top
FD9  FIDUCIALUFIDUCIAL  [FIDUCIAL-MICRO]  52.49,5 0 top
FD10  FIDUCIALUFIDUCIAL  [FIDUCIAL-MICRO]  52.48,5 0 bottom
FD11  FIDUCIALUFIDUCIAL  [FIDUCIAL-MICRO]  73.2,21.3 0 bottom
FD12  FIDUCIALUFIDUCIAL  [FIDUCIAL-MICRO]  73.2,21.3 0 top
FD13  FIDUCIALUFIDUCIAL  [FIDUCIAL-MICRO]  75,5 0 top
FD14  FIDUCIALUFIDUCIAL  [FIDUCIAL-MICRO]  74.99,5 0 bottom
FD15  FIDUCIALUFIDUCIAL  [FIDUCIAL-MICRO]  95.7,21.3 0 bottom
FD16  FIDUCIALUFIDUCIAL  [FIDUCIAL-MICRO]  95.7,21.3 0 top
FD17  FIDUCIALUFIDUCIAL  [FIDUCIAL-MICRO]  97.5,5 0 top
FD18  FIDUCIALUFIDUCIAL  [FIDUCIAL-MICRO]  97.49,5 0 bottom
FD19  FIDUCIALUFIDUCIAL  [FIDUCIAL-MICRO]  118.21,21.3 0 bottom
FD20  FIDUCIALUFIDUCIAL  [FIDUCIAL-MICRO]  118.21,21.3 0 top
FD21  FIDUCIALUFIDUCIAL  [FIDUCIAL-MICRO]  120.01,5 0 top
FD22  FIDUCIALUFIDUCIAL  [FIDUCIAL-MICRO]  120,5 0 bottom
FD23  FIDUCIALUFIDUCIAL  [FIDUCIAL-MICRO]  140.72,21.3 0 bottom
FD24  FIDUCIALUFIDUCIAL  [FIDUCIAL-MICRO]  140.72,21.3 0 top
FD25  FIDUCIALUFIDUCIAL  [FIDUCIAL-MICRO]  142.52,5 0 top
FD26  FIDUCIALUFIDUCIAL  [FIDUCIAL-MICRO]  142.51,5 0 bottom
FD27  FIDUCIALUFIDUCIAL  [FIDUCIAL-MICRO]  163.23,21.3 0 bottom
FD28  FIDUCIALUFIDUCIAL  [FIDUCIAL-MICRO]  163.23,21.3 0 top
FD29  FIDUCIALUFIDUCIAL  [FIDUCIAL-MICRO]  165.03,5 0 top
FD30  FIDUCIALUFIDUCIAL  [FIDUCIAL-MICRO]  165.02,5 0 bottom
FD31  FIDUCIALUFIDUCIAL  [FIDUCIAL-MICRO]  185.74,21.3 0 bottom
FD32  FIDUCIALUFIDUCIAL  [FIDUCIAL-MICRO]  185.74,21.3 0 top
FD33  FIDUCIALUFIDUCIAL  [FIDUCIAL-MICRO]  28.24,64.85 180 top
FD34  FIDUCIALUFIDUCIAL  [FIDUCIAL-MICRO]  28.25,64.85 180 bottom
FD35  FIDUCIALUFIDUCIAL  [FIDUCIAL-MICRO]  7.53,48.55 180 bottom
FD36  FIDUCIALUFIDUCIAL  [FIDUCIAL-MICRO]  7.53,48.55 180 top
FD37  FIDUCIALUFIDUCIAL  [FIDUCIAL-MICRO]  50.75,64.85 180 top
FD38  FIDUCIALUFIDUCIAL  [FIDUCIAL-MICRO]  50.76,64.85 180 bottom
FD39  FIDUCIALUFIDUCIAL  [FIDUCIAL-MICRO]  30.04,48.55 180 bottom
FD40  FIDUCIALUFIDUCIAL  [FIDUCIAL-MICRO]  30.04,48.55 180 top
FD41  FIDUCIALUFIDUCIAL  [FIDUCIAL-MICRO]  73.26,64.85 180 top
FD42  FIDUCIALUFIDUCIAL  [FIDUCIAL-MICRO]  73.27,64.85 180 bottom
FD43  FIDUCIALUFIDUCIAL  [FIDUCIAL-MICRO]  52.55,48.55 180 bottom
FD44  FIDUCIALUFIDUCIAL  [FIDUCIAL-MICRO]  52.55,48.55 180 top
FD45  FIDUCIALUFIDUCIAL  [FIDUCIAL-MICRO]  95.77,64.85 180 top
FD46  FIDUCIALUFIDUCIAL  [FIDUCIAL-MICRO]  95.78,64.85 180 bottom
FD47  FIDUCIALUFIDUCIAL  [FIDUCIAL-MICRO]  75.06,48.55 180 bottom
FD48  FIDUCIALUFIDUCIAL  [FIDUCIAL-MICRO]  75.06,48.55 180 top
FD49  FIDUCIALUFIDUCIAL  [FIDUCIAL-MICRO]  118.28,64.85 180 top
FD50  FIDUCIALUFIDUCIAL  [FIDUCIAL-MICRO]  118.29,64.85 180 bottom
FD51  FIDUCIALUFIDUCIAL  [FIDUCIAL-MICRO]  97.57,48.55 180 bottom
FD52  FIDUCIALUFIDUCIAL  [FIDUCIAL-MICRO]  97.57,48.55 180 top
FD53  FIDUCIALUFIDUCIAL  [FIDUCIAL-MICRO]  140.79,64.85 180 top
FD54  FIDUCIALUFIDUCIAL  [FIDUCIAL-MICRO]  140.8,64.85 180 bottom
FD55  FIDUCIALUFIDUCIAL  [FIDUCIAL-MICRO]  120.08,48.55 180 bottom
FD56  FIDUCIALUFIDUCIAL  [FIDUCIAL-MICRO]  120.08,48.55 180 top
FD57  FIDUCIALUFIDUCIAL  [FIDUCIAL-MICRO]  163.29,64.85 180 top
FD58  FIDUCIALUFIDUCIAL  [FIDUCIAL-MICRO]  163.3,64.85 180 bottom
FD59  FIDUCIALUFIDUCIAL  [FIDUCIAL-MICRO]  142.58,48.55 180 bottom
FD60  FIDUCIALUFIDUCIAL  [FIDUCIAL-MICRO]  142.58,48.55 180 top
FD61  FIDUCIALUFIDUCIAL  [FIDUCIAL-MICRO]  185.8,64.85 180 top
FD62  FIDUCIALUFIDUCIAL  [FIDUCIAL-MICRO]  185.81,64.85 180 bottom
FD63  FIDUCIALUFIDUCIAL  [FIDUCIAL-MICRO]  165.09,48.55 180 bottom
FD64  FIDUCIALUFIDUCIAL  [FIDUCIAL-MICRO]  165.09,48.55 180 top
J1  MICROMOD-2222  [M.2-CARD-E-22]  17.86,0 0 top
J2  MICROMOD-2222  [M.2-CARD-E-22]  40.36,0 0 top
J3  MICROMOD-2222  [M.2-CARD-E-22]  62.87,0 0 top
J4  MICROMOD-2222  [M.2-CARD-E-22]  85.38,0 0 top
J5  MICROMOD-2222  [M.2-CARD-E-22]  107.89,0 0 top
J6  MICROMOD-2222  [M.2-CARD-E-22]  130.4,0 0 top
J7  MICROMOD-2222  [M.2-CARD-E-22]  152.91,0 0 top
J8  MICROMOD-2222  [M.2-CARD-E-22]  175.41,0 0 top
J9  MICROMOD-2222  [M.2-CARD-E-22]  17.86,69.85 180 top
J10  MICROMOD-2222  [M.2-CARD-E-22]  40.37,69.85 180 top
J11  MICROMOD-2222  [M.2-CARD-E-22]  62.87,69.85 180 top
J12  MICROMOD-2222  [M.2-CARD-E-22]  85.38,69.85 180 top
J13  MICROMOD-2222  [M.2-CARD-E-22]  107.89,69.85 180 top
J14  MICROMOD-2222  [M.2-CARD-E-22]  130.4,69.85 180 top
J15  MICROMOD-2222  [M.2-CARD-E-22]  152.91,69.85 180 top
J16  MICROMOD-2222  [M.2-CARD-E-22]  175.41,69.85 180 top
L1  0  [0402-TIGHT]  12.08,12.83 0 top
L2  0  [0402-TIGHT]  34.59,12.83 0 top
L3  0  [0402-TIGHT]  57.1,12.83 0 top
L4  0  [0402-TIGHT]  79.61,12.83 0 top
L5  0  [0402-TIGHT]  102.12,12.83 0 top
L6  0  [0402-TIGHT]  124.62,12.83 0 top
L7  0  [0402-TIGHT]  147.13,12.83 0 top
L8  0  [0402-TIGHT]  169.64,12.83 0 top
L9  0  [0402-TIGHT]  23.63,57.02 180 top
L10  0  [0402-TIGHT]  46.14,57.02 180 top
L11  0  [0402-TIGHT]  68.65,57.02 180 top
L12  0  [0402-TIGHT]  91.16,57.02 180 top
L13  0  [0402-TIGHT]  113.66,57.02 180 top
L14  0  [0402-TIGHT]  136.17,57.02 180 top
L15  0  [0402-TIGHT]  158.68,57.02 180 top
L16  0  [0402-TIGHT]  181.19,57.02 180 top
LOGO1  SFE_LOGO_NAME_FLAME.1_INCH  [SFE_LOGO_NAME_FLAME_.1]  36.48,17.32 0 bottom
LOGO2  SFE_LOGO_NAME_FLAME.1_INCH  [SFE_LOGO_NAME_FLAME_.1]  13.97,17.32 0 bottom
LOGO3  OSHW-LOGOS  [OSHW-LOGO-S]  22.89,8.59 0 bottom
LOGO4  OSHW-LOGOS  [OSHW-LOGO-S]  45.39,8.59 0 bottom
LOGO5  SFE_LOGO_NAME_FLAME.1_INCH  [SFE_LOGO_NAME_FLAME_.1]  58.99,17.32 0 bottom
LOGO6  OSHW-LOGOS  [OSHW-LOGO-S]  67.9,8.59 0 bottom
LOGO7  SFE_LOGO_NAME_FLAME.1_INCH  [SFE_LOGO_NAME_FLAME_.1]  81.49,17.32 0 bottom
LOGO8  OSHW-LOGOS  [OSHW-LOGO-S]  90.41,8.59 0 bottom
LOGO9  SFE_LOGO_NAME_FLAME.1_INCH  [SFE_LOGO_NAME_FLAME_.1]  104,17.32 0 bottom
LOGO10  OSHW-LOGOS  [OSHW-LOGO-S]  112.92,8.59 0 bottom
LOGO11  SFE_LOGO_NAME_FLAME.1_INCH  [SFE_LOGO_NAME_FLAME_.1]  126.51,17.32 0 bottom
LOGO12  OSHW-LOGOS  [OSHW-LOGO-S]  135.43,8.59 0 bottom
LOGO13  SFE_LOGO_NAME_FLAME.1_INCH  [SFE_LOGO_NAME_FLAME_.1]  149.02,17.32 0 bottom
LOGO14  OSHW-LOGOS  [OSHW-LOGO-S]  157.93,8.59 0 bottom
LOGO15  SFE_LOGO_NAME_FLAME.1_INCH  [SFE_LOGO_NAME_FLAME_.1]  171.53,17.32 0 bottom
LOGO16  OSHW-LOGOS  [OSHW-LOGO-S]  180.44,8.59 0 bottom
LOGO17  SFE_LOGO_NAME_FLAME.1_INCH  [SFE_LOGO_NAME_FLAME_.1]  21.74,52.53 180 bottom
LOGO18  OSHW-LOGOS  [OSHW-LOGO-S]  12.83,61.26 180 bottom
LOGO19  SFE_LOGO_NAME_FLAME.1_INCH  [SFE_LOGO_NAME_FLAME_.1]  44.25,52.53 180 bottom
LOGO20  OSHW-LOGOS  [OSHW-LOGO-S]  35.34,61.26 180 bottom
LOGO21  SFE_LOGO_NAME_FLAME.1_INCH  [SFE_LOGO_NAME_FLAME_.1]  66.76,52.53 180 bottom
LOGO22  OSHW-LOGOS  [OSHW-LOGO-S]  57.85,61.26 180 bottom
LOGO23  SFE_LOGO_NAME_FLAME.1_INCH  [SFE_LOGO_NAME_FLAME_.1]  89.27,52.53 180 bottom
LOGO24  OSHW-LOGOS  [OSHW-LOGO-S]  80.36,61.26 180 bottom
LOGO25  SFE_LOGO_NAME_FLAME.1_INCH  [SFE_LOGO_NAME_FLAME_.1]  111.78,52.53 180 bottom
LOGO26  OSHW-LOGOS  [OSHW-LOGO-S]  102.86,61.26 180 bottom
LOGO27  SFE_LOGO_NAME_FLAME.1_INCH  [SFE_LOGO_NAME_FLAME_.1]  134.29,52.53 180 bottom
LOGO28  OSHW-LOGOS  [OSHW-LOGO-S]  125.37,61.26 180 bottom
LOGO29  SFE_LOGO_NAME_FLAME.1_INCH  [SFE_LOGO_NAME_FLAME_.1]  156.79,52.53 180 bottom
LOGO30  OSHW-LOGOS  [OSHW-LOGO-S]  147.88,61.26 180 bottom
LOGO31  SFE_LOGO_NAME_FLAME.1_INCH  [SFE_LOGO_NAME_FLAME_.1]  179.3,52.53 180 bottom
LOGO32  OSHW-LOGOS  [OSHW-LOGO-S]  170.39,61.26 180 bottom
Q1  MBT3904DW1T1  [SC70-6]  49.38,9.69 90 bottom
Q2  MBT3904DW1T1  [SC70-6]  26.87,9.69 90 bottom
Q3  MBT3904DW1T1  [SC70-6]  71.89,9.69 90 bottom
Q4  MBT3904DW1T1  [SC70-6]  94.4,9.69 90 bottom
Q5  MBT3904DW1T1  [SC70-6]  116.91,9.69 90 bottom
Q6  MBT3904DW1T1  [SC70-6]  139.41,9.69 90 bottom
Q7  MBT3904DW1T1  [SC70-6]  161.92,9.69 90 bottom
Q8  MBT3904DW1T1  [SC70-6]  184.43,9.69 90 bottom
Q9  MBT3904DW1T1  [SC70-6]  8.84,60.16 270 bottom
Q10  MBT3904DW1T1  [SC70-6]  31.35,60.16 270 bottom
Q11  MBT3904DW1T1  [SC70-6]  53.86,60.16 270 bottom
Q12  MBT3904DW1T1  [SC70-6]  76.37,60.16 270 bottom
Q13  MBT3904DW1T1  [SC70-6]  98.87,60.16 270 bottom
Q14  MBT3904DW1T1  [SC70-6]  121.38,60.16 270 bottom
Q15  MBT3904DW1T1  [SC70-6]  143.89,60.16 270 bottom
Q16  MBT3904DW1T1  [SC70-6]  166.4,60.16 270 bottom
R1  10k  [0402-TIGHT]  11.56,9.35 180 top
R2  20k  [0402-TIGHT]  13.27,16.22 180 top
R3  22k  [0402-TIGHT]  27.09,20.11 180 bottom
R4  33k  [0402-TIGHT]  27.09,19.18 0 bottom
R5  2.2k  [0402-TIGHT]  25.15,19.18 0 bottom
R6  10k  [0402-TIGHT]  34.06,9.35 180 top
R7  10k  [0402-TIGHT]  49.38,7.54 180 bottom
R8  1k  [0402-TIGHT]  26.42,17.53 0 top
R9  10k  [0402-TIGHT]  16.15,5.06 90 top
R10  10k  [0402-TIGHT]  49.38,11.68 0 bottom
R11  20k  [0402-TIGHT]  35.77,16.22 180 top
R12  1k  [0402-TIGHT]  48.92,17.53 0 top
R13  10k  [0402-TIGHT]  38.66,5.06 90 top
R14  22k  [0402-TIGHT]  49.59,20.11 180 bottom
R15  33k  [0402-TIGHT]  49.59,19.18 0 bottom
R16  2.2k  [0402-TIGHT]  47.66,19.18 0 bottom
R17  10k  [0402-TIGHT]  26.87,7.54 180 bottom
R18  10k  [0402-TIGHT]  26.87,11.68 0 bottom
R19  10k  [0402-TIGHT]  56.57,9.35 180 top
R20  10k  [0402-TIGHT]  71.89,7.54 180 bottom
R21  10k  [0402-TIGHT]  71.89,11.68 0 bottom
R22  20k  [0402-TIGHT]  58.28,16.22 180 top
R23  1k  [0402-TIGHT]  71.43,17.53 0 top
R24  10k  [0402-TIGHT]  61.17,5.06 90 top
R25  22k  [0402-TIGHT]  72.1,20.11 180 bottom
R26  33k  [0402-TIGHT]  72.1,19.18 0 bottom
R27  2.2k  [0402-TIGHT]  70.17,19.18 0 bottom
R28  10k  [0402-TIGHT]  79.08,9.35 180 top
R29  10k  [0402-TIGHT]  94.4,7.54 180 bottom
R30  10k  [0402-TIGHT]  94.4,11.68 0 bottom
R31  20k  [0402-TIGHT]  80.79,16.22 180 top
R32  1k  [0402-TIGHT]  93.94,17.53 0 top
R33  10k  [0402-TIGHT]  83.67,5.06 90 top
R34  22k  [0402-TIGHT]  94.61,20.11 180 bottom
R35  33k  [0402-TIGHT]  94.61,19.18 0 bottom
R36  2.2k  [0402-TIGHT]  92.67,19.18 0 bottom
R37  10k  [0402-TIGHT]  101.59,9.35 180 top
R38  10k  [0402-TIGHT]  116.91,7.54 180 bottom
R39  10k  [0402-TIGHT]  116.91,11.68 0 bottom
R40  20k  [0402-TIGHT]  103.3,16.22 180 top
R41  1k  [0402-TIGHT]  116.45,17.53 0 top
R42  10k  [0402-TIGHT]  106.18,5.06 90 top
R43  22k  [0402-TIGHT]  117.12,20.11 180 bottom
R44  33k  [0402-TIGHT]  117.12,19.18 0 bottom
R45  2.2k  [0402-TIGHT]  115.18,19.18 0 bottom
R46  10k  [0402-TIGHT]  124.1,9.35 180 top
R47  10k  [0402-TIGHT]  139.41,7.54 180 bottom
R48  10k  [0402-TIGHT]  139.41,11.68 0 bottom
R49  20k  [0402-TIGHT]  125.8,16.22 180 top
R50  1k  [0402-TIGHT]  138.96,17.53 0 top
R51  10k  [0402-TIGHT]  128.69,5.06 90 top
R52  22k  [0402-TIGHT]  139.63,20.11 180 bottom
R53  33k  [0402-TIGHT]  139.63,19.18 0 bottom
R54  2.2k  [0402-TIGHT]  137.69,19.18 0 bottom
R55  10k  [0402-TIGHT]  146.61,9.35 180 top
R56  10k  [0402-TIGHT]  161.92,7.54 180 bottom
R57  10k  [0402-TIGHT]  161.92,11.68 0 bottom
R58  20k  [0402-TIGHT]  148.31,16.22 180 top
R59  1k  [0402-TIGHT]  161.47,17.53 0 top
R60  10k  [0402-TIGHT]  151.2,5.06 90 top
R61  22k  [0402-TIGHT]  162.14,20.11 180 bottom
R62  33k  [0402-TIGHT]  162.14,19.18 0 bottom
R63  2.2k  [0402-TIGHT]  160.2,19.18 0 bottom
R64  10k  [0402-TIGHT]  169.11,9.35 180 top
R65  10k  [0402-TIGHT]  184.43,7.54 180 bottom
R66  10k  [0402-TIGHT]  184.43,11.68 0 bottom
R67  20k  [0402-TIGHT]  170.82,16.22 180 top
R68  1k  [0402-TIGHT]  183.97,17.53 0 top
R69  10k  [0402-TIGHT]  173.71,5.06 90 top
R70  22k  [0402-TIGHT]  184.64,20.11 180 bottom
R71  33k  [0402-TIGHT]  184.64,19.18 0 bottom
R72  2.2k  [0402-TIGHT]  182.71,19.18 0 bottom
R73  10k  [0402-TIGHT]  24.16,60.5 0 top
R74  10k  [0402-TIGHT]  8.84,62.31 0 bottom
R75  10k  [0402-TIGHT]  8.84,58.17 180 bottom
R76  20k  [0402-TIGHT]  22.45,53.63 0 top
R77  1k  [0402-TIGHT]  9.3,52.32 180 top
R78  10k  [0402-TIGHT]  19.57,64.79 270 top
R79  22k  [0402-TIGHT]  8.63,49.74 0 bottom
R80  33k  [0402-TIGHT]  8.63,50.67 180 bottom
R81  2.2k  [0402-TIGHT]  10.56,50.67 180 bottom
R82  10k  [0402-TIGHT]  46.67,60.5 0 top
R83  10k  [0402-TIGHT]  31.35,62.31 0 bottom
R84  10k  [0402-TIGHT]  31.35,58.17 180 bottom
R85  20k  [0402-TIGHT]  44.96,53.63 0 top
R86  1k  [0402-TIGHT]  31.81,52.32 180 top
R87  10k  [0402-TIGHT]  42.08,64.79 270 top
R88  22k  [0402-TIGHT]  31.14,49.74 0 bottom
R89  33k  [0402-TIGHT]  31.14,50.67 180 bottom
R90  2.2k  [0402-TIGHT]  33.07,50.67 180 bottom
R91  10k  [0402-TIGHT]  69.17,60.5 0 top
R92  10k  [0402-TIGHT]  53.86,62.31 0 bottom
R93  10k  [0402-TIGHT]  53.86,58.17 180 bottom
R94  20k  [0402-TIGHT]  67.47,53.63 0 top
R95  1k  [0402-TIGHT]  54.32,52.32 180 top
R96  10k  [0402-TIGHT]  64.58,64.79 270 top
R97  22k  [0402-TIGHT]  53.65,49.74 0 bottom
R98  33k  [0402-TIGHT]  53.65,50.67 180 bottom
R99  2.2k  [0402-TIGHT]  55.58,50.67 180 bottom
R100  10k  [0402-TIGHT]  91.68,60.5 0 top
R101  10k  [0402-TIGHT]  76.37,62.31 0 bottom
R102  10k  [0402-TIGHT]  76.37,58.17 180 bottom
R103  20k  [0402-TIGHT]  89.98,53.63 0 top
R104  1k  [0402-TIGHT]  76.82,52.32 180 top
R105  10k  [0402-TIGHT]  87.09,64.79 270 top
R106  22k  [0402-TIGHT]  76.15,49.74 0 bottom
R107  33k  [0402-TIGHT]  76.15,50.67 180 bottom
R108  2.2k  [0402-TIGHT]  78.09,50.67 180 bottom
R109  10k  [0402-TIGHT]  114.19,60.5 0 top
R110  10k  [0402-TIGHT]  98.87,62.31 0 bottom
R111  10k  [0402-TIGHT]  98.87,58.17 180 bottom
R112  20k  [0402-TIGHT]  112.48,53.63 0 top
R113  1k  [0402-TIGHT]  99.33,52.32 180 top
R114  10k  [0402-TIGHT]  109.6,64.79 270 top
R115  22k  [0402-TIGHT]  98.66,49.74 0 bottom
R116  33k  [0402-TIGHT]  98.66,50.67 180 bottom
R117  2.2k  [0402-TIGHT]  100.6,50.67 180 bottom
R118  10k  [0402-TIGHT]  136.7,60.5 0 top
R119  10k  [0402-TIGHT]  121.38,62.31 0 bottom
R120  10k  [0402-TIGHT]  121.38,58.17 180 bottom
R121  20k  [0402-TIGHT]  134.99,53.63 0 top
R122  1k  [0402-TIGHT]  121.84,52.32 180 top
R123  10k  [0402-TIGHT]  132.11,64.79 270 top
R124  22k  [0402-TIGHT]  121.17,49.74 0 bottom
R125  33k  [0402-TIGHT]  121.17,50.67 180 bottom
R126  2.2k  [0402-TIGHT]  123.11,50.67 180 bottom
R127  10k  [0402-TIGHT]  159.21,60.5 0 top
R128  10k  [0402-TIGHT]  143.89,62.31 0 bottom
R129  10k  [0402-TIGHT]  143.89,58.17 180 bottom
R130  20k  [0402-TIGHT]  157.5,53.63 0 top
R131  1k  [0402-TIGHT]  144.35,52.32 180 top
R132  10k  [0402-TIGHT]  154.62,64.79 270 top
R133  22k  [0402-TIGHT]  143.68,49.74 0 bottom
R134  33k  [0402-TIGHT]  143.68,50.67 180 bottom
R135  2.2k  [0402-TIGHT]  145.61,50.67 180 bottom
R136  10k  [0402-TIGHT]  181.71,60.5 0 top
R137  10k  [0402-TIGHT]  166.4,62.31 0 bottom
R138  10k  [0402-TIGHT]  166.4,58.17 180 bottom
R139  20k  [0402-TIGHT]  180.01,53.63 0 top
R140  1k  [0402-TIGHT]  166.86,52.32 180 top
R141  10k  [0402-TIGHT]  177.12,64.79 270 top
R142  22k  [0402-TIGHT]  166.19,49.74 0 bottom
R143  33k  [0402-TIGHT]  166.19,50.67 180 bottom
R144  2.2k  [0402-TIGHT]  168.12,50.67 180 bottom
U1  W25QXX128MBIT-6X5  [WSON-8-6X5]  17.86,11 90 bottom
U2  ESP32  [QFN48-0.4MM]  17.86,11 0 top
U3  ESP32  [QFN48-0.4MM]  40.36,11 0 top
U4  CP210X  [QFN24]  25.9,15.94 180 bottom
U5  CP210X  [QFN24]  48.41,15.94 180 bottom
U6  W25QXX128MBIT-6X5  [WSON-8-6X5]  40.36,11 90 bottom
U7  ESP32  [QFN48-0.4MM]  62.87,11 0 top
U8  CP210X  [QFN24]  70.92,15.94 180 bottom
U9  W25QXX128MBIT-6X5  [WSON-8-6X5]  62.87,11 90 bottom
U10  ESP32  [QFN48-0.4MM]  85.38,11 0 top
U11  CP210X  [QFN24]  93.43,15.94 180 bottom
U12  W25QXX128MBIT-6X5  [WSON-8-6X5]  85.38,11 90 bottom
U13  ESP32  [QFN48-0.4MM]  107.89,11 0 top
U14  CP210X  [QFN24]  115.93,15.94 180 bottom
U15  W25QXX128MBIT-6X5  [WSON-8-6X5]  107.89,11 90 bottom
U16  ESP32  [QFN48-0.4MM]  130.4,11 0 top
U17  CP210X  [QFN24]  138.44,15.94 180 bottom
U18  W25QXX128MBIT-6X5  [WSON-8-6X5]  130.4,11 90 bottom
U19  ESP32  [QFN48-0.4MM]  152.91,11 0 top
U20  CP210X  [QFN24]  160.95,15.94 180 bottom
U21  W25QXX128MBIT-6X5  [WSON-8-6X5]  152.91,11 90 bottom
U22  ESP32  [QFN48-0.4MM]  175.41,11 0 top
U23  CP210X  [QFN24]  183.46,15.94 180 bottom
U24  W25QXX128MBIT-6X5  [WSON-8-6X5]  175.41,11 90 bottom
U25  ESP32  [QFN48-0.4MM]  17.86,58.85 180 top
U26  CP210X  [QFN24]  9.81,53.91 0 bottom
U27  W25QXX128MBIT-6X5  [WSON-8-6X5]  17.86,58.85 270 bottom
U28  ESP32  [QFN48-0.4MM]  40.37,58.85 180 top
U29  CP210X  [QFN24]  32.32,53.91 0 bottom
U30  W25QXX128MBIT-6X5  [WSON-8-6X5]  40.37,58.85 270 bottom
U31  ESP32  [QFN48-0.4MM]  62.87,58.85 180 top
U32  CP210X  [QFN24]  54.83,53.91 0 bottom
U33  W25QXX128MBIT-6X5  [WSON-8-6X5]  62.87,58.85 270 bottom
U34  ESP32  [QFN48-0.4MM]  85.38,58.85 180 top
U35  CP210X  [QFN24]  77.34,53.91 0 bottom
U36  W25QXX128MBIT-6X5  [WSON-8-6X5]  85.38,58.85 270 bottom
U37  ESP32  [QFN48-0.4MM]  107.89,58.85 180 top
U38  CP210X  [QFN24]  99.85,53.91 0 bottom
U39  W25QXX128MBIT-6X5  [WSON-8-6X5]  107.89,58.85 270 bottom
U40  ESP32  [QFN48-0.4MM]  130.4,58.85 180 top
U41  CP210X  [QFN24]  122.36,53.91 0 bottom
U42  W25QXX128MBIT-6X5  [WSON-8-6X5]  130.4,58.85 270 bottom
U43  ESP32  [QFN48-0.4MM]  152.91,58.85 180 top
U44  CP210X  [QFN24]  144.86,53.91 0 bottom
U45  W25QXX128MBIT-6X5  [WSON-8-6X5]  152.91,58.85 270 bottom
U46  ESP32  [QFN48-0.4MM]  175.41,58.85 180 top
U47  CP210X  [QFN24]  167.37,53.91 0 bottom
U48  W25QXX128MBIT-6X5  [WSON-8-6X5]  175.41,58.85 270 bottom
U$1  [STAT0]  23.88,18.8 0 top
U$2  [MICROMOD_LOGO_.5]  26.29,10.46 90 top
U$3  [ESP321]  23.5,4.24 90 top
U$4  [SFE_LOGO_FLAME_.1]  23.5,14.61 90 top
U$5  [STAT0]  46.38,18.8 0 top
U$6  [MICROMOD_LOGO_.5]  14.68,5.94 0 bottom
U$7  [ESP321]  16.28,8.69 0 bottom
U$8  [ESP321]  46,4.24 90 top
U$9  [MICROMOD_LOGO_.5]  48.8,10.46 90 top
U$10  [SFE_LOGO_FLAME_.1]  46,14.61 90 top
U$11  [MICROMOD_LOGO_.5]  37.19,5.94 0 bottom
U$12  [ESP321]  38.79,8.69 0 bottom
U$13  [STAT0]  68.89,18.8 0 top
U$14  [ESP321]  68.51,4.24 90 top
U$15  [MICROMOD_LOGO_.5]  71.31,10.46 90 top
U$16  [SFE_LOGO_FLAME_.1]  68.51,14.61 90 top
U$17  [MICROMOD_LOGO_.5]  59.7,5.94 0 bottom
U$18  [ESP321]  61.3,8.69 0 bottom
U$19  [STAT0]  91.4,18.8 0 top
U$20  [ESP321]  91.02,4.24 90 top
U$21  [MICROMOD_LOGO_.5]  93.81,10.46 90 top
U$22  [SFE_LOGO_FLAME_.1]  91.02,14.61 90 top
U$23  [MICROMOD_LOGO_.5]  82.2,5.94 0 bottom
U$24  [ESP321]  83.8,8.69 0 bottom
U$25  [STAT0]  113.91,18.8 0 top
U$26  [ESP321]  113.53,4.24 90 top
U$27  [MICROMOD_LOGO_.5]  116.32,10.46 90 top
U$28  [SFE_LOGO_FLAME_.1]  113.53,14.61 90 top
U$29  [MICROMOD_LOGO_.5]  104.71,5.94 0 bottom
U$30  [ESP321]  106.31,8.69 0 bottom
U$31  [STAT0]  136.42,18.8 0 top
U$32  [ESP321]  136.03,4.24 90 top
U$33  [MICROMOD_LOGO_.5]  138.83,10.46 90 top
U$34  [SFE_LOGO_FLAME_.1]  136.03,14.61 90 top
U$35  [MICROMOD_LOGO_.5]  127.22,5.94 0 bottom
U$36  [ESP321]  128.82,8.69 0 bottom
U$37  [STAT0]  158.93,18.8 0 top
U$38  [ESP321]  158.54,4.24 90 top
U$39  [MICROMOD_LOGO_.5]  161.34,10.46 90 top
U$40  [SFE_LOGO_FLAME_.1]  158.54,14.61 90 top
U$41  [MICROMOD_LOGO_.5]  149.73,5.94 0 bottom
U$42  [ESP321]  151.33,8.69 0 bottom
U$43  [STAT0]  181.43,18.8 0 top
U$44  [ESP321]  181.05,4.24 90 top
U$45  [MICROMOD_LOGO_.5]  183.85,10.46 90 top
U$46  [SFE_LOGO_FLAME_.1]  181.05,14.61 90 top
U$47  [MICROMOD_LOGO_.5]  172.24,5.94 0 bottom
U$48  [ESP321]  173.84,8.69 0 bottom
U$49  [STAT0]  11.84,51.05 180 top
U$50  [ESP321]  12.22,65.61 270 top
U$51  [MICROMOD_LOGO_.5]  9.43,59.39 270 top
U$52  [SFE_LOGO_FLAME_.1]  12.22,55.24 270 top
U$53  [MICROMOD_LOGO_.5]  21.03,63.91 180 bottom
U$54  [ESP321]  19.43,61.16 180 bottom
U$55  [STAT0]  34.35,51.05 180 top
U$56  [ESP321]  34.73,65.61 270 top
U$57  [MICROMOD_LOGO_.5]  31.94,59.39 270 top
U$58  [SFE_LOGO_FLAME_.1]  34.73,55.24 270 top
U$59  [MICROMOD_LOGO_.5]  43.54,63.91 180 bottom
U$60  [ESP321]  41.94,61.16 180 bottom
U$61  [STAT0]  56.86,51.05 180 top
U$62  [ESP321]  57.24,65.61 270 top
U$63  [MICROMOD_LOGO_.5]  54.44,59.39 270 top
U$64  [SFE_LOGO_FLAME_.1]  57.24,55.24 270 top
U$65  [MICROMOD_LOGO_.5]  66.05,63.91 180 bottom
U$66  [ESP321]  64.45,61.16 180 bottom
U$67  [STAT0]  79.36,51.05 180 top
U$68  [ESP321]  79.75,65.61 270 top
U$69  [MICROMOD_LOGO_.5]  76.95,59.39 270 top
U$70  [SFE_LOGO_FLAME_.1]  79.75,55.24 270 top
U$71  [MICROMOD_LOGO_.5]  88.56,63.91 180 bottom
U$72  [ESP321]  86.96,61.16 180 bottom
U$73  [STAT0]  101.87,51.05 180 top
U$74  [ESP321]  102.25,65.61 270 top
U$75  [MICROMOD_LOGO_.5]  99.46,59.39 270 top
U$76  [SFE_LOGO_FLAME_.1]  102.25,55.24 270 top
U$77  [MICROMOD_LOGO_.5]  111.07,63.91 180 bottom
U$78  [ESP321]  109.47,61.16 180 bottom
U$79  [STAT0]  124.38,51.05 180 top
U$80  [ESP321]  124.76,65.61 270 top
U$81  [MICROMOD_LOGO_.5]  121.97,59.39 270 top
U$82  [SFE_LOGO_FLAME_.1]  124.76,55.24 270 top
U$83  [MICROMOD_LOGO_.5]  133.58,63.91 180 bottom
U$84  [ESP321]  131.98,61.16 180 bottom
U$85  [STAT0]  146.89,51.05 180 top
U$86  [ESP321]  147.27,65.61 270 top
U$87  [MICROMOD_LOGO_.5]  144.48,59.39 270 top
U$88  [SFE_LOGO_FLAME_.1]  147.27,55.24 270 top
U$89  [MICROMOD_LOGO_.5]  156.08,63.91 180 bottom
U$90  [ESP321]  154.48,61.16 180 bottom
U$91  [STAT0]  169.4,51.05 180 top
U$92  [ESP321]  169.78,65.61 270 top
U$93  [MICROMOD_LOGO_.5]  166.98,59.39 270 top
U$94  [SFE_LOGO_FLAME_.1]  169.78,55.24 270 top
U$95  [MICROMOD_LOGO_.5]  178.59,63.91 180 bottom
U$96  [ESP321]  176.99,61.16 180 bottom
Y1  40MHz  [CRYSTAL-SMD-2X2.5MM]  17.62,17.64 180 top
Y2  32.768kHz  [CRYSTAL-SMD-3.2X1.5MM]  10.71,7.33 0 top
Y3  40MHz  [CRYSTAL-SMD-2X2.5MM]  40.12,17.64 180 top
Y4  32.768kHz  [CRYSTAL-SMD-3.2X1.5MM]  33.22,7.33 0 top
Y5  40MHz  [CRYSTAL-SMD-2X2.5MM]  62.63,17.64 180 top
Y6  32.768kHz  [CRYSTAL-SMD-3.2X1.5MM]  55.73,7.33 0 top
Y7  40MHz  [CRYSTAL-SMD-2X2.5MM]  85.14,17.64 180 top
Y8  32.768kHz  [CRYSTAL-SMD-3.2X1.5MM]  78.23,7.33 0 top
Y9  40MHz  [CRYSTAL-SMD-2X2.5MM]  107.65,17.64 180 top
Y10  32.768kHz  [CRYSTAL-SMD-3.2X1.5MM]  100.74,7.33 0 top
Y11  40MHz  [CRYSTAL-SMD-2X2.5MM]  130.16,17.64 180 top
Y12  32.768kHz  [CRYSTAL-SMD-3.2X1.5MM]  123.25,7.33 0 top
Y13  40MHz  [CRYSTAL-SMD-2X2.5MM]  152.67,17.64 180 top
Y14  32.768kHz  [CRYSTAL-SMD-3.2X1.5MM]  145.76,7.33 0 top
Y15  40MHz  [CRYSTAL-SMD-2X2.5MM]  175.17,17.64 180 top
Y16  32.768kHz  [CRYSTAL-SMD-3.2X1.5MM]  168.27,7.33 0 top
Y17  40MHz  [CRYSTAL-SMD-2X2.5MM]  18.1,52.21 0 top
Y18  32.768kHz  [CRYSTAL-SMD-3.2X1.5MM]  25.01,62.52 180 top
Y19  40MHz  [CRYSTAL-SMD-2X2.5MM]  40.61,52.21 0 top
Y20  32.768kHz  [CRYSTAL-SMD-3.2X1.5MM]  47.52,62.52 180 top
Y21  40MHz  [CRYSTAL-SMD-2X2.5MM]  63.12,52.21 0 top
Y22  32.768kHz  [CRYSTAL-SMD-3.2X1.5MM]  70.02,62.52 180 top
Y23  40MHz  [CRYSTAL-SMD-2X2.5MM]  85.62,52.21 0 top
Y24  32.768kHz  [CRYSTAL-SMD-3.2X1.5MM]  92.53,62.52 180 top
Y25  40MHz  [CRYSTAL-SMD-2X2.5MM]  108.13,52.21 0 top
Y26  32.768kHz  [CRYSTAL-SMD-3.2X1.5MM]  115.04,62.52 180 top
Y27  40MHz  [CRYSTAL-SMD-2X2.5MM]  130.64,52.21 0 top
Y28  32.768kHz  [CRYSTAL-SMD-3.2X1.5MM]  137.55,62.52 180 top
Y29  40MHz  [CRYSTAL-SMD-2X2.5MM]  153.15,52.21 0 top
Y30  32.768kHz  [CRYSTAL-SMD-3.2X1.5MM]  160.06,62.52 180 top
Y31  40MHz  [CRYSTAL-SMD-2X2.5MM]  175.66,52.21 0 top
Y32  32.768kHz  [CRYSTAL-SMD-3.2X1.5MM]  182.56,62.52 180 top

## Library data of the parts
A1-A16 = SparkFun-RF; PROD_ID: ANT-14377
C1 C2 C11 C14 C41 C44 C61 C64 C81 C84 C101 C104 C121 C124 C141 C144 C161 C164 C181 C184 C201 C204 C221 C224 C241 C244 C261 C264 C281 C284 C301 C304 = SparkFun-Capacitors; PROD_ID: CAP-15129
C3 C4 C33 C34 C53 C54 C73 C74 C93 C94 C113 C114 C133 C134 C153 C154 C173 C174 C193 C194 C213 C214 C233 C234 C253 C254 C273 C274 C293 C294 C313 C314 = SparkFun-Capacitors; PROD_ID: CAP-14665
C5 C35 C55 C75 C95 C115 C135 C155 C175 C195 C215 C235 C255 C275 C295 C315 = SparkFun-Capacitors; PROD_ID: CAP-14847
C6 C12 C15-C17 C20 C21 C23 C25 C28 C30 C37 C42 C45 C46 C48 C50 C57 C62 C65 C66 C68 C70 C77 C82 C85 C86 C88 C90 C97 C102 C105 C106 C108 C110 C117 C122 C125 C126 C128 C130 C137 C142 C145 C146 C148 C150 C157 C162 C165 C166 C168 C170 C177 C182 C185 C186 C188 C190 C197 C202 C205 C206 C208 C210 C217 C222 C225 C226 C228 C230 C237 C242 C245 C246 C248 C250 C257 C262 C265 C266 C268 C270 C277 C282 C285 C286 C288 C290 C297 C302 C305 C306 C308 C310 C317 = SparkFun-Capacitors; PROD_ID: CAP-12416
C7 C38 C58 C78 C98 C118 C138 C158 C178 C198 C218 C238 C258 C278 C298 C318 = SparkFun-Capacitors; PROD_ID: CAP-14240
C8 C10 C39 C40 C59 C60 C79 C80 C99 C100 C119 C120 C139 C140 C159 C160 C179 C180 C199 C200 C219 C220 C239 C240 C259 C260 C279 C280 C299 C300 C319 C320 = SparkFun-Capacitors
C9 C26 C31 C36 C51 C56 C71 C76 C91 C96 C111 C116 C131 C136 C151 C156 C171 C176 C191 C196 C211 C216 C231 C236 C251 C256 C271 C276 C291 C296 C311 C316 = SparkFun-Capacitors; PROD_ID: CAP-13063
C13 C18 C43 C63 C83 C103 C123 C143 C163 C183 C203 C223 C243 C263 C283 C303 = SparkFun-Capacitors; PROD_ID: CAP-13458
C19 C22 C47 C67 C87 C107 C127 C147 C167 C187 C207 C227 C247 C267 C287 C307 = SparkFun-Capacitors; PROD_ID: CAP-14848
C24 C29 C49 C69 C89 C109 C129 C149 C169 C189 C209 C229 C249 C269 C289 C309 = SparkFun-Capacitors; PROD_ID: CAP-12417
C27 C32 C52 C72 C92 C112 C132 C152 C172 C192 C212 C232 C252 C272 C292 C312 = SparkFun-Capacitors; PROD_ID: CAP-15130
D1-D16 = SparkFun-LED; PROD_ID: DIO-08575
E$1-E$4 FD1-FD64 LOGO1-LOGO32 U$4 U$10 U$16 U$22 U$28 U$34 U$40 U$46 U$52 U$58 U$64 U$70 U$76 U$82 U$88 U$94 = SparkFun-Aesthetics
E$5 E$6 = SparkFun-Retired
J1-J16 U$2 U$6 U$9 U$11 U$15 U$17 U$21 U$23 U$27 U$29 U$33 U$35 U$39 U$41 U$45 U$47 U$51 U$53 U$57 U$59 U$63 U$65 U$69 U$71 U$75 U$77 U$81 U$83 U$87 U$89 U$93 U$95 = SparkFun-MicroMod
L1-L16 = SparkFun-Resistors; PROD_ID: RES-14244
Q1-Q16 = SparkFun-DiscreteSemi; PROD_ID: TRANS-13337
R1 R6 R7 R9 R10 R13 R17-R21 R24 R28-R30 R33 R37-R39 R42 R46-R48 R51 R55-R57 R60 R64-R66 R69 R73-R75 R78 R82-R84 R87 R91-R93 R96 R100-R102 R105 R109-R111 R114 R118-R120 R123 R127-R129 R132 R136-R138 R141 = SparkFun-Resistors; PROD_ID: RES-14241
R2 R11 R22 R31 R40 R49 R58 R67 R76 R85 R94 R103 R112 R121 R130 R139 = SparkFun-Resistors; PROD_ID: RES-15131
R3 R14 R25 R34 R43 R52 R61 R70 R79 R88 R97 R106 R115 R124 R133 R142 = SparkFun-Resistors; PROD_ID: RES-14281
R4 R15 R26 R35 R44 R53 R62 R71 R80 R89 R98 R107 R116 R125 R134 R143 = SparkFun-Resistors; PROD_ID: RES-15128
R5 R16 R27 R36 R45 R54 R63 R72 R81 R90 R99 R108 R117 R126 R135 R144 = SparkFun-Resistors; PROD_ID: RES-14341
R8 R12 R23 R32 R41 R50 R59 R68 R77 R86 R95 R104 R113 R122 R131 R140 = SparkFun-Resistors; PROD_ID: RES-14342
U1 U6 U9 U12 U15 U18 U21 U24 U27 U30 U33 U36 U39 U42 U45 U48 = SparkFun-MicroMod; PROD_ID: IC-15107
U2 U3 U7 U10 U13 U16 U19 U22 U25 U28 U31 U34 U37 U40 U43 U46 = SparkFun-RF; PROD_ID: IC-13338
U4 U5 U8 U11 U14 U17 U20 U23 U26 U29 U32 U35 U38 U41 U44 U47 = SparkFun-IC-Comms; PROD_ID: IC-14020
U$1 U$5 U$13 U$19 U$25 U$31 U$37 U$43 U$49 U$55 U$61 U$67 U$73 U$79 U$85 U$91 = buzzard_labels
U$3 U$7 U$8 U$12 U$14 U$18 U$20 U$24 U$26 U$30 U$32 U$36 U$38 U$42 U$44 U$48 U$50 U$54 U$56 U$60 U$62 U$66 U$68 U$72 U$74 U$78 U$80 U$84 U$86 U$90 U$92 U$96 = buzzard_labels (1)
Y1 Y3 Y5 Y7 Y9 Y11 Y13 Y15 Y17 Y19 Y21 Y23 Y25 Y27 Y29 Y31 = SparkFun-Clocks; PROD_ID: XTAL-15127; VALUE: 40MHZ
Y2 Y4 Y6 Y8 Y10 Y12 Y14 Y16 Y18 Y20 Y22 Y24 Y26 Y28 Y30 Y32 = SparkFun-Clocks; PROD_ID: XTAL-13062